# Altium PCB FPGA_DB.PcbDoc (part 5 of 5)
Units mil, origin at the board's own origin, x right, y up, seen from the top; angles counter-clockwise.
Board outline 5980 x 6510 mil, 4 copper layers (Top, Ground Plane, Power Plane, Bottom), stack 61.497 mil thick; 140 components, 246 nets, 1021 pads, 2685 vias.
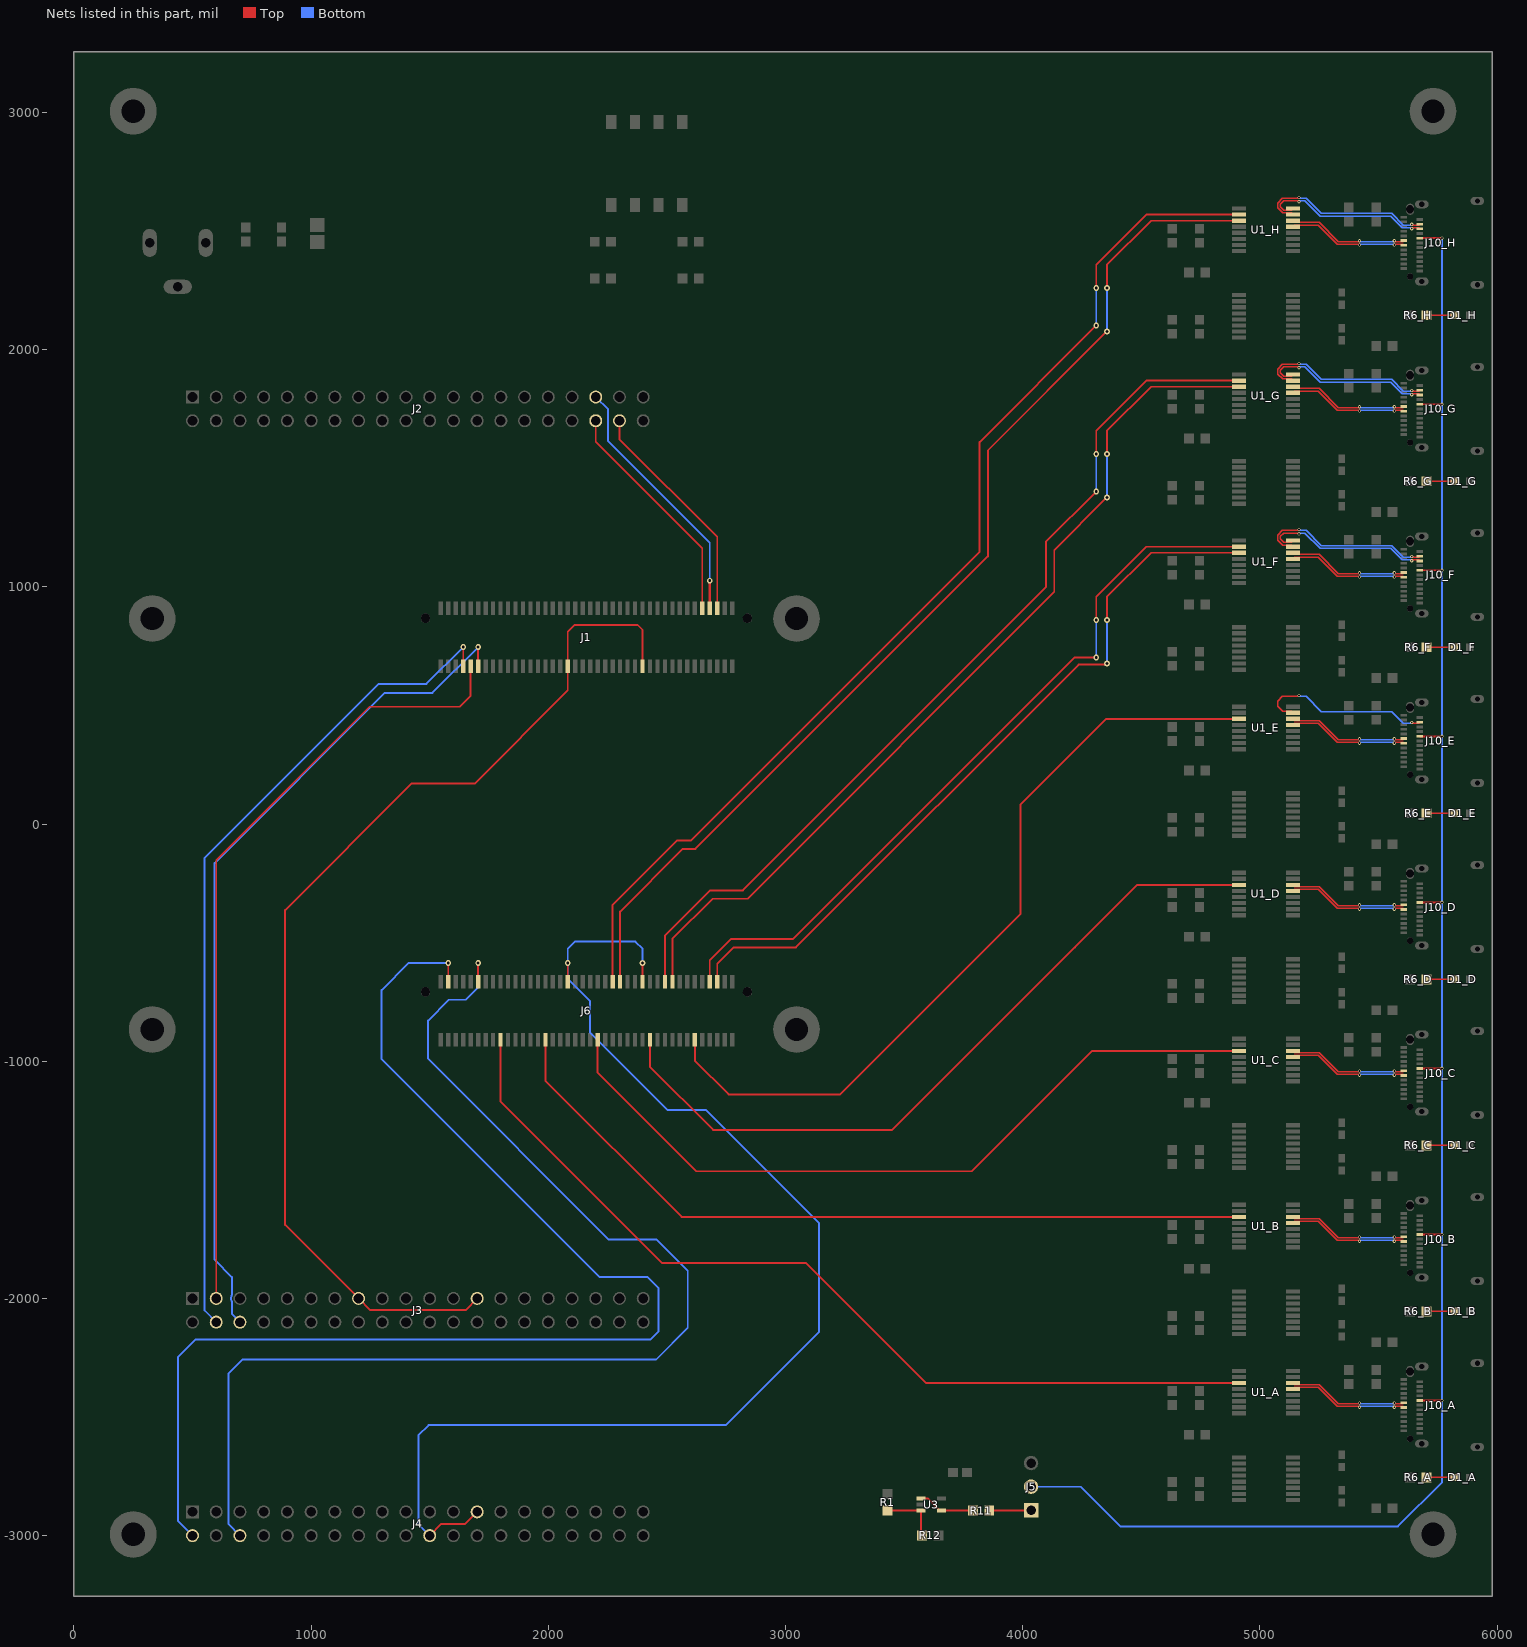
[diagram p7: the nets of this part, all layers, seen from the top]

## Via types
v1: diameter 14, hole 8, Top to Bottom, tented both sides, 2392 vias
v2: diameter 24, hole 12, Top to Bottom, tented both sides, 293 vias

## Nets (pads, with @x,y where several pads share a name; then routed paths per layer and width w, separated by ;. In a path a pad name is that pad's centre, name@x,y a point inside that pad or via, vN(x,y) a via of type N, cw(c..) or ccw(c..) an arc to the next point about the centre after c; other vN are vias at no path point) (continued)
MOSI_E_P: J10_E.B2 U1_E.15 | length 1518.7
  Top w6.3: 5074.33,497.1 5095.32,476.12 ; 5074.33,497.1 5074.33,517.28 ; 5074.33,497.1 5095.32,476.12 ; 5074.33,497.1 5074.33,517.28 ; 5074.33,517.28 5095.13,538.07 ; 5074.33,517.28 5095.13,538.07 ; 5095.13,538.07 v1@5161.65,538.07 ; 5095.13,538.07 v1@5161.65,538.07 ; 5095.32,476.12 U1_E.15@5132.03,476.12 ; 5095.32,476.12 U1_E.15@5132.03,476.12 ; U1_E.15@5132.03,476.12 U1_E.15@5139.17,468.98 U1_E.15@5132.03,476.12 ; v1@5161.65,538.07 v1(5165,541.42) v1@5161.65,538.07 ; v1@5643.35,424.55 J10_E.B2@5669.9,424.55 ; v1@5643.35,424.55 v1(5640,427.9) v1@5643.35,424.55 ; v1@5643.35,424.55 J10_E.B2@5669.9,424.55 ; J10_E.B2@5669.9,424.55 J10_E.B2@5674.09,428.74 J10_E.B2@5669.9,424.55
  Bottom w6.3: v1@5168.35,538.07 v1(5165,541.42) v1@5168.35,538.07 ; v1@5168.35,538.07 5194.68,538.07 ; v1@5168.35,538.07 5194.68,538.07 ; 5194.68,538.07 5258.82,473.93 ; 5194.68,538.07 5258.82,473.93 ; 5258.82,473.93 5540,473.93 ; 5258.82,473.93 5540,473.93 ; 5540,473.93 5555.62,473.93 ; 5540,473.93 5555.62,473.93 ; 5555.62,473.93 5605,424.55 ; 5555.62,473.93 5605,424.55 ; 5605,424.55 v1@5636.65,424.55 ; 5605,424.55 v1@5636.65,424.55 ; v1@5636.65,424.55 v1(5640,427.9) v1@5636.65,424.55
MOSI_F: J6.73 U1_F.2 | length 3194.3
  Top w8: J6.73@2680.59,-665.98 2680.59,-574.41 2770,-485 3031,-485 4217.61,701.61 v2(4310,701.61) ; v2(4310,860) 4310,958.27 4520.71,1168.98 U1_F.2@4910.83,1168.98
  Bottom w8: v2(4310,701.61) v2(4310,860)
MOSI_F_N: J10_F.B3 U1_F.16 | length 721.9
  Top w6.3: U1_F.16@5139.17,1194.57 5132.03,1187.42 5100,1187.42 5085.64,1201.79 5085.64,1212.6 5099.81,1226.77 5161.65,1226.77 v1(5165,1223.42) ; v1(5640,1109.9) 5643.35,1113.25 5669.9,1113.25 J10_F.B3@5674.09,1109.06
  Bottom w6.3: v1(5165,1223.42) 5168.35,1226.77 5190,1226.77 5254.14,1162.63 5294.55,1162.63 5550.93,1162.63 5600.32,1113.25 5636.65,1113.25 v1(5640,1109.9)
MOSI_F_P: J10_F.B2 U1_F.15 | length 759.3
  Top w6.3: U1_F.15@5139.17,1168.98 5132.03,1176.12 5095.32,1176.12 5074.33,1197.1 5074.33,1217.28 5095.13,1238.07 5161.65,1238.07 v1(5165,1241.42) ; v1(5640,1127.9) 5643.35,1124.55 5669.9,1124.55 J10_F.B2@5674.09,1128.74
  Bottom w6.3: v1(5165,1241.42) 5168.35,1238.07 5194.68,1238.07 5258.82,1173.93 5540,1173.93 5555.62,1173.93 5605,1124.55 5636.65,1124.55 v1(5640,1127.9)
MOSI_G: J6.61 U1_G.2 | length 3846.2
  Top w8: J6.61@2491.61,-665.98 2491.61,-470.78 2682.39,-280 2820,-280 4098.02,998.02 4098.02,1189.64 v2(4310,1401.61) ; v2(4310,1560) 4310,1658.27 4520.71,1868.98 U1_G.2@4910.83,1868.98
  Bottom w8: v2(4310,1401.61) v2(4310,1560)
MOSI_G_N: J10_G.B3 U1_G.16 | length 721.9
  Top w6.3: U1_G.16@5139.17,1894.57 5132.03,1887.42 5100,1887.42 5085.64,1901.79 5085.64,1912.6 5099.81,1926.77 5161.65,1926.77 v1(5165,1923.42) ; v1(5640,1809.9) 5643.35,1813.25 5669.9,1813.25 J10_G.B3@5674.09,1809.06
  Bottom w6.3: v1(5165,1923.42) 5168.35,1926.77 5190,1926.77 5254.14,1862.63 5294.55,1862.63 5550.93,1862.63 5600.32,1813.25 5636.65,1813.25 v1(5640,1809.9)
MOSI_G_P: J10_G.B2 U1_G.15 | length 759.3
  Top w6.3: U1_G.15@5139.17,1868.98 5132.03,1876.12 5095.32,1876.12 5074.33,1897.1 5074.33,1917.28 5095.13,1938.07 5161.65,1938.07 v1(5165,1941.42) ; v1(5640,1827.9) 5643.35,1824.55 5669.9,1824.55 J10_G.B2@5674.09,1828.74
  Bottom w6.3: v1(5165,1941.42) 5168.35,1938.07 5194.68,1938.07 5258.82,1873.93 5540,1873.93 5555.62,1873.93 5605,1824.55 5636.65,1824.55 v1(5640,1827.9)
MOSI_H: J6.47 U1_H.2 | length 4590.9
  Top w8: J6.47@2271.14,-665.98 2271.14,-340.86 2542,-70 2600,-70 3818,1148 3818,1609.61 v2(4310,2101.61) ; v2(4310,2260) 4310,2358.27 4520.71,2568.98 U1_H.2@4910.83,2568.98
  Bottom w8: v2(4310,2101.61) v2(4310,2260)
MOSI_H_N: J10_H.B3 U1_H.16 | length 721.9
  Top w6.3: U1_H.16@5139.17,2594.57 5132.03,2587.42 5100,2587.42 5085.64,2601.79 5085.64,2612.6 5099.81,2626.77 5161.65,2626.77 v1(5165,2623.42) ; v1(5640,2509.9) 5643.35,2513.25 5669.9,2513.25 J10_H.B3@5674.09,2509.06
  Bottom w6.3: v1(5165,2623.42) 5168.35,2626.77 5190,2626.77 5254.14,2562.63 5294.55,2562.63 5550.93,2562.63 5600.32,2513.25 5636.65,2513.25 v1(5640,2509.9)
MOSI_H_P: J10_H.B2 U1_H.15 | length 759.3
  Top w6.3: U1_H.15@5139.17,2568.98 5132.03,2576.12 5095.32,2576.12 5074.33,2597.1 5074.33,2617.28 5095.13,2638.07 5161.65,2638.07 v1(5165,2641.42) ; v1(5640,2527.9) 5643.35,2524.55 5669.9,2524.55 J10_H.B2@5674.09,2528.74
  Bottom w6.3: v1(5165,2641.42) 5168.35,2638.07 5194.68,2638.07 5258.82,2573.93 5540,2573.93 5555.62,2573.93 5605,2524.55 5636.65,2524.55 v1(5640,2527.9)
NetD1_A_2: D1_A.2 R6_A.1 | length 118.1
  Top w6.3: R6_A.1@5701.97,-2755 D1_A.2@5820.04,-2755
NetD1_B_2: D1_B.2 R6_B.1 | length 118.1
  Top w6.3: R6_B.1@5701.97,-2055 D1_B.2@5820.04,-2055
NetD1_C_2: D1_C.2 R6_C.1 | length 118.1
  Top w6.3: R6_C.1@5701.97,-1355 D1_C.2@5820.04,-1355
NetD1_D_2: D1_D.2 R6_D.1 | length 118.1
  Top w6.3: R6_D.1@5701.97,-655 D1_D.2@5820.04,-655
NetD1_E_2: D1_E.2 R6_E.1 | length 118.1
  Top w6.3: R6_E.1@5701.97,45 D1_E.2@5820.04,45
NetD1_F_2: D1_F.2 R6_F.1 | length 118.1
  Top w6.3: R6_F.1@5701.97,745 D1_F.2@5820.04,745
NetD1_G_2: D1_G.2 R6_G.1 | length 118.1
  Top w6.3: R6_G.1@5701.97,1445 D1_G.2@5820.04,1445
NetD1_H_2: D1_H.2 R6_H.1 | length 118.1
  Top w6.3: R6_H.1@5701.97,2145 D1_H.2@5820.04,2145
NetJ5_1: J5.1 R11.2 | length 176.3
  Top w8: R11.2@3858.9,-2894.57 4034.41,-2894.57 J5.1@4035,-2893.98
NetR1_2: R1.2 R12.1 U3.3 | length 247.9
  Top w8: R1.2@3430,-2893.98 3430.59,-2894.57 U3.3@3571.69,-2894.57 3571.69,-2995.12 R12.1@3575.55,-2998.98
NetR11_1: R11.1 U3.1 U3.4 | length 239.5
  Top w8: U3.1@3571.69,-2843.39 3599.41,-2843.39 3650.59,-2894.57 U3.4@3658.31,-2894.57 R11.1@3790,-2894.57
REF: J5.2 J10_A.B5 J10_B.B5 J10_C.B5 J10_D.B5 J10_E.B5 J10_F.B5 J10_G.B5 J10_H.B5 | length 7872.4
  Top w8: J10_A.B5@5674.09,-2430.31 v1(5767.65,-2430.31) ; J10_B.B5@5674.09,-1730.31 v1(5767.65,-1730.31) ; J10_C.B5@5674.09,-1030.31 v1(5767.65,-1030.31) ; J10_D.B5@5674.09,-330.31 v1(5767.65,-330.31) ; J10_E.B5@5674.09,369.69 v1(5767.65,369.69) ; J10_F.B5@5674.09,1069.69 v1(5767.65,1069.69) ; J10_G.B5@5674.09,1769.69 v1(5767.65,1769.69) ; J10_H.B5@5674.09,2469.69 v1(5767.65,2469.69)
  Bottom w8: J5.2@4035,-2793.98 4245.01,-2793.98 4412.19,-2961.15 5581.97,-2961.15 5767.65,-2775.47 v1(5767.65,2469.69)
SCLK_A: J6.18 U1_A.3 | length 3865
  Top w8: J6.18@1798.7,-908.98 1798.7,-1170.52 2478.18,-1850 3085,-1850 3591.61,-2356.61 4265,-2356.61 U1_A.3@4910.83,-2356.61
SCLK_A_N: J10_A.A6 U1_A.13 | length 511.6
  Top w6.3: U1_A.13@5139.17,-2382.2 5146.32,-2375.06 5245.52,-2375.06 5326.11,-2455.65 5416.65,-2455.65 v1(5420,-2459) ; v1(5566.74,-2459) 5570.08,-2455.65 5602.97,-2455.65 J10_A.A6@5607.17,-2459.84
  Bottom w6.3: v1(5420,-2459) 5423.35,-2455.65 5563.39,-2455.65 v1(5566.74,-2459)
SCLK_A_P: J10_A.A7 U1_A.14 | length 511.6
  Top w6.3: U1_A.14@5139.17,-2356.61 5146.32,-2363.76 5250.2,-2363.76 5330.79,-2444.35 5416.65,-2444.35 v1(5420,-2441) ; v1(5566.74,-2441) 5570.08,-2444.35 5602.97,-2444.35 J10_A.A7@5607.17,-2440.16
  Bottom w6.3: v1(5420,-2441) 5423.35,-2444.35 5563.39,-2444.35 v1(5566.74,-2441)
SCLK_B: J6.30 U1_B.3 | length 3334.6
  Top w8: J6.30@1987.68,-908.98 1987.68,-1082.68 2561.61,-1656.61 4609.36,-1656.61 4724.36,-1656.61 U1_B.3@4910.83,-1656.61
SCLK_B_N: J10_B.A6 U1_B.13 | length 1023.2
  Top w6.3: U1_B.13@5146.32,-1675.06 U1_B.13@5139.17,-1682.2 U1_B.13@5146.32,-1675.06 ; U1_B.13@5146.32,-1675.06 5245.52,-1675.06 ; U1_B.13@5146.32,-1675.06 5245.52,-1675.06 ; 5245.52,-1675.06 5326.11,-1755.65 ; 5245.52,-1675.06 5326.11,-1755.65 ; 5326.11,-1755.65 v1@5416.65,-1755.65 ; 5326.11,-1755.65 v1@5416.65,-1755.65 ; v1@5416.65,-1755.65 v1(5420,-1759) v1@5416.65,-1755.65 ; v1@5570.08,-1755.65 J10_B.A6@5602.97,-1755.65 ; v1@5570.08,-1755.65 v1(5566.74,-1759) v1@5570.08,-1755.65 ; v1@5570.08,-1755.65 J10_B.A6@5602.97,-1755.65 ; J10_B.A6@5602.97,-1755.65 J10_B.A6@5607.17,-1759.84 J10_B.A6@5602.97,-1755.65
  Bottom w6.3: v1@5423.35,-1755.65 v1@5563.39,-1755.65 ; v1@5423.35,-1755.65 v1(5420,-1759) v1@5423.35,-1755.65 ; v1@5423.35,-1755.65 v1@5563.39,-1755.65 ; v1@5563.39,-1755.65 v1(5566.74,-1759) v1@5563.39,-1755.65
SCLK_B_P: J10_B.A7 U1_B.14 | length 1023.2
  Top w6.3: U1_B.14@5146.32,-1663.76 U1_B.14@5139.17,-1656.61 U1_B.14@5146.32,-1663.76 ; U1_B.14@5146.32,-1663.76 5250.2,-1663.76 ; U1_B.14@5146.32,-1663.76 5250.2,-1663.76 ; 5250.2,-1663.76 5330.79,-1744.35 ; 5250.2,-1663.76 5330.79,-1744.35 ; 5330.79,-1744.35 v1@5416.65,-1744.35 ; 5330.79,-1744.35 v1@5416.65,-1744.35 ; v1@5416.65,-1744.35 v1(5420,-1741) v1@5416.65,-1744.35 ; v1@5570.08,-1744.35 J10_B.A7@5602.97,-1744.35 ; v1@5570.08,-1744.35 v1(5566.74,-1741) v1@5570.08,-1744.35 ; v1@5570.08,-1744.35 J10_B.A7@5602.97,-1744.35 ; J10_B.A7@5602.97,-1744.35 J10_B.A7@5607.17,-1740.16 J10_B.A7@5602.97,-1744.35
  Bottom w6.3: v1@5423.35,-1744.35 v1@5563.39,-1744.35 ; v1@5423.35,-1744.35 v1(5420,-1741) v1@5423.35,-1744.35 ; v1@5423.35,-1744.35 v1@5563.39,-1744.35 ; v1@5563.39,-1744.35 v1(5566.74,-1741) v1@5563.39,-1744.35
SCLK_C: J6.44 U1_C.3 | length 3224.4
  Top w8: J6.44@2208.15,-908.98 2208.15,-1048.66 2623.35,-1463.86 3786.14,-1463.86 4293.39,-956.61 U1_C.3@4910.83,-956.61
SCLK_C_N: J10_C.A6 U1_C.13 | length 1023.2
  Top w6.3: U1_C.13@5146.32,-975.06 U1_C.13@5139.17,-982.2 U1_C.13@5146.32,-975.06 ; U1_C.13@5146.32,-975.06 5245.52,-975.06 ; U1_C.13@5146.32,-975.06 5245.52,-975.06 ; 5245.52,-975.06 5326.11,-1055.65 ; 5245.52,-975.06 5326.11,-1055.65 ; 5326.11,-1055.65 v1@5416.65,-1055.65 ; 5326.11,-1055.65 v1@5416.65,-1055.65 ; v1@5416.65,-1055.65 v1(5420,-1059) v1@5416.65,-1055.65 ; v1@5570.08,-1055.65 J10_C.A6@5602.97,-1055.65 ; v1@5570.08,-1055.65 v1(5566.74,-1059) v1@5570.08,-1055.65 ; v1@5570.08,-1055.65 J10_C.A6@5602.97,-1055.65 ; J10_C.A6@5602.97,-1055.65 J10_C.A6@5607.17,-1059.84 J10_C.A6@5602.97,-1055.65
  Bottom w6.3: v1@5423.35,-1055.65 v1@5563.39,-1055.65 ; v1@5423.35,-1055.65 v1(5420,-1059) v1@5423.35,-1055.65 ; v1@5423.35,-1055.65 v1@5563.39,-1055.65 ; v1@5563.39,-1055.65 v1(5566.74,-1059) v1@5563.39,-1055.65
SCLK_C_P: J10_C.A7 U1_C.14 | length 1023.2
  Top w6.3: U1_C.14@5146.32,-963.76 U1_C.14@5139.17,-956.61 U1_C.14@5146.32,-963.76 ; U1_C.14@5146.32,-963.76 5250.2,-963.76 ; U1_C.14@5146.32,-963.76 5250.2,-963.76 ; 5250.2,-963.76 5330.79,-1044.35 ; 5250.2,-963.76 5330.79,-1044.35 ; 5330.79,-1044.35 v1@5416.65,-1044.35 ; 5330.79,-1044.35 v1@5416.65,-1044.35 ; v1@5416.65,-1044.35 v1(5420,-1041) v1@5416.65,-1044.35 ; v1@5570.08,-1044.35 J10_C.A7@5602.97,-1044.35 ; v1@5570.08,-1044.35 v1(5566.74,-1041) v1@5570.08,-1044.35 ; v1@5570.08,-1044.35 J10_C.A7@5602.97,-1044.35 ; J10_C.A7@5602.97,-1044.35 J10_C.A7@5607.17,-1040.16 J10_C.A7@5602.97,-1044.35
  Bottom w6.3: v1@5423.35,-1044.35 v1@5563.39,-1044.35 ; v1@5423.35,-1044.35 v1(5420,-1041) v1@5423.35,-1044.35 ; v1@5423.35,-1044.35 v1@5563.39,-1044.35 ; v1@5563.39,-1044.35 v1(5566.74,-1041) v1@5563.39,-1044.35
SCLK_D: J6.58 U1_D.3 | length 3135.2
  Top w8: J6.58@2428.62,-908.98 2428.62,-1023.62 2695,-1290 3450,-1290 4220,-520 4483.39,-256.61 U1_D.3@4910.83,-256.61
SCLK_D_N: J10_D.A6 U1_D.13 | length 1023.2
  Top w6.3: U1_D.13@5146.32,-275.06 U1_D.13@5139.17,-282.2 U1_D.13@5146.32,-275.06 ; U1_D.13@5146.32,-275.06 5245.52,-275.06 ; U1_D.13@5146.32,-275.06 5245.52,-275.06 ; 5245.52,-275.06 5326.11,-355.65 ; 5245.52,-275.06 5326.11,-355.65 ; 5326.11,-355.65 v1@5416.65,-355.65 ; 5326.11,-355.65 v1@5416.65,-355.65 ; v1@5416.65,-355.65 v1(5420,-359) v1@5416.65,-355.65 ; v1@5570.08,-355.65 J10_D.A6@5602.97,-355.65 ; v1@5570.08,-355.65 v1(5566.74,-359) v1@5570.08,-355.65 ; v1@5570.08,-355.65 J10_D.A6@5602.97,-355.65 ; J10_D.A6@5602.97,-355.65 J10_D.A6@5607.17,-359.84 J10_D.A6@5602.97,-355.65
  Bottom w6.3: v1@5423.35,-355.65 v1@5563.39,-355.65 ; v1@5423.35,-355.65 v1(5420,-359) v1@5423.35,-355.65 ; v1@5423.35,-355.65 v1@5563.39,-355.65 ; v1@5563.39,-355.65 v1(5566.74,-359) v1@5563.39,-355.65
SCLK_D_P: J10_D.A7 U1_D.14 | length 1023.2
  Top w6.3: U1_D.14@5146.32,-263.76 U1_D.14@5139.17,-256.61 U1_D.14@5146.32,-263.76 ; U1_D.14@5146.32,-263.76 5250.2,-263.76 ; U1_D.14@5146.32,-263.76 5250.2,-263.76 ; 5250.2,-263.76 5330.79,-344.35 ; 5250.2,-263.76 5330.79,-344.35 ; 5330.79,-344.35 v1@5416.65,-344.35 ; 5330.79,-344.35 v1@5416.65,-344.35 ; v1@5416.65,-344.35 v1(5420,-341) v1@5416.65,-344.35 ; v1@5570.08,-344.35 J10_D.A7@5602.97,-344.35 ; v1@5570.08,-344.35 v1(5566.74,-341) v1@5570.08,-344.35 ; v1@5570.08,-344.35 J10_D.A7@5602.97,-344.35 ; J10_D.A7@5602.97,-344.35 J10_D.A7@5607.17,-340.16 J10_D.A7@5602.97,-344.35
  Bottom w6.3: v1@5423.35,-344.35 v1@5563.39,-344.35 ; v1@5423.35,-344.35 v1(5420,-341) v1@5423.35,-344.35 ; v1@5423.35,-344.35 v1@5563.39,-344.35 ; v1@5563.39,-344.35 v1(5566.74,-341) v1@5563.39,-344.35
SCLK_E: J6.70 U1_E.3 | length 3367
  Top w8: J6.70@2617.6,-908.98 2617.6,-997.6 2760,-1140 3230,-1140 3990,-380 3990,81.46 4351.93,443.39 U1_E.3@4910.83,443.39
SCLK_E_N: J10_E.A6 U1_E.13 | length 1023.2
  Top w6.3: U1_E.13@5146.32,424.94 U1_E.13@5139.17,417.8 U1_E.13@5146.32,424.94 ; U1_E.13@5146.32,424.94 5245.52,424.94 ; U1_E.13@5146.32,424.94 5245.52,424.94 ; 5245.52,424.94 5326.11,344.35 ; 5245.52,424.94 5326.11,344.35 ; 5326.11,344.35 v1@5416.65,344.35 ; 5326.11,344.35 v1@5416.65,344.35 ; v1@5416.65,344.35 v1(5420,341) v1@5416.65,344.35 ; v1@5570.08,344.35 J10_E.A6@5602.97,344.35 ; v1@5570.08,344.35 v1(5566.74,341) v1@5570.08,344.35 ; v1@5570.08,344.35 J10_E.A6@5602.97,344.35 ; J10_E.A6@5602.97,344.35 J10_E.A6@5607.17,340.16 J10_E.A6@5602.97,344.35
  Bottom w6.3: v1@5423.35,344.35 v1@5563.39,344.35 ; v1@5423.35,344.35 v1(5420,341) v1@5423.35,344.35 ; v1@5423.35,344.35 v1@5563.39,344.35 ; v1@5563.39,344.35 v1(5566.74,341) v1@5563.39,344.35
SCLK_E_P: J10_E.A7 U1_E.14 | length 1023.2
  Top w6.3: U1_E.14@5146.32,436.24 U1_E.14@5139.17,443.39 U1_E.14@5146.32,436.24 ; U1_E.14@5146.32,436.24 5250.2,436.24 ; U1_E.14@5146.32,436.24 5250.2,436.24 ; 5250.2,436.24 5330.79,355.65 ; 5250.2,436.24 5330.79,355.65 ; 5330.79,355.65 v1@5416.65,355.65 ; 5330.79,355.65 v1@5416.65,355.65 ; v1@5416.65,355.65 v1(5420,359) v1@5416.65,355.65 ; v1@5570.08,355.65 J10_E.A7@5602.97,355.65 ; v1@5570.08,355.65 v1(5566.74,359) v1@5570.08,355.65 ; v1@5570.08,355.65 J10_E.A7@5602.97,355.65 ; J10_E.A7@5602.97,355.65 J10_E.A7@5607.17,359.84 J10_E.A7@5602.97,355.65
  Bottom w6.3: v1@5423.35,355.65 v1@5563.39,355.65 ; v1@5423.35,355.65 v1(5420,359) v1@5423.35,355.65 ; v1@5423.35,355.65 v1@5563.39,355.65 ; v1@5563.39,355.65 v1(5566.74,359) v1@5563.39,355.65
SCLK_F: J6.75 U1_F.3 | length 3157.6
  Top w8: J6.75@2712.09,-665.98 2712.09,-589.07 2781.16,-520 3044,-520 4235.61,671.61 4350,671.61 v2(4355,676.61) ; v2(4355,860) 4355,957.2 4541.18,1143.39 U1_F.3@4910.83,1143.39
  Bottom w8: v2(4355,676.61) v2(4355,860)
SCLK_F_N: J10_F.A6 U1_F.13 | length 511.6
  Top w6.3: U1_F.13@5139.17,1117.8 5146.32,1124.94 5245.52,1124.94 5326.11,1044.35 5416.65,1044.35 v1(5420,1041) ; v1(5566.74,1041) 5570.08,1044.35 5602.97,1044.35 J10_F.A6@5607.17,1040.16
  Bottom w6.3: v1(5420,1041) 5423.35,1044.35 5563.39,1044.35 v1(5566.74,1041)
SCLK_F_P: J10_F.A7 U1_F.14 | length 511.6
  Top w6.3: U1_F.14@5139.17,1143.39 5146.32,1136.24 5250.2,1136.24 5330.79,1055.65 5416.65,1055.65 v1(5420,1059) ; v1(5566.74,1059) 5570.08,1055.65 5602.97,1055.65 J10_F.A7@5607.17,1059.84
  Bottom w6.3: v1(5420,1059) 5423.35,1055.65 5563.39,1055.65 v1(5566.74,1059)
SCLK_G: J6.63 U1_G.3 | length 3801.4
  Top w8: J6.63@2523.11,-665.98 2523.11,-484.28 2692.39,-315 2840,-315 4133.12,978.12 4133.12,1154.73 v2(4355,1376.61) ; v2(4355,1560) 4355,1657.2 4541.18,1843.39 U1_G.3@4910.83,1843.39
  Bottom w8: v2(4355,1376.61) v2(4355,1560)
SCLK_G_N: J10_G.A6 U1_G.13 | length 511.6
  Top w6.3: U1_G.13@5139.17,1817.8 5146.32,1824.94 5245.52,1824.94 5326.11,1744.35 5416.65,1744.35 v1(5420,1741) ; v1(5566.74,1741) 5570.08,1744.35 5602.97,1744.35 J10_G.A6@5607.17,1740.16
  Bottom w6.3: v1(5420,1741) 5423.35,1744.35 5563.39,1744.35 v1(5566.74,1741)
SCLK_G_P: J10_G.A7 U1_G.14 | length 511.6
  Top w6.3: U1_G.14@5139.17,1843.39 5146.32,1836.24 5250.2,1836.24 5330.79,1755.65 5416.65,1755.65 v1(5420,1759) ; v1(5566.74,1759) 5570.08,1755.65 5602.97,1755.65 J10_G.A7@5607.17,1759.84
  Bottom w6.3: v1(5420,1759) 5423.35,1755.65 5563.39,1755.65 v1(5566.74,1759)
SCLK_H: J6.49 U1_H.3 | length 4537.3
  Top w8: J6.49@2302.64,-665.98 2302.64,-369.36 2567,-105 2620,-105 3853,1128 3853,1574.61 v2(4355,2076.61) ; v2(4355,2260) 4355,2357.2 4541.18,2543.39 U1_H.3@4910.83,2543.39
  Bottom w8: v2(4355,2076.61) v2(4355,2260)
SCLK_H_N: J10_H.A6 U1_H.13 | length 511.6
  Top w6.3: U1_H.13@5139.17,2517.8 5146.32,2524.94 5245.52,2524.94 5326.11,2444.35 5416.65,2444.35 v1(5420,2441) ; v1(5566.74,2441) 5570.08,2444.35 5602.97,2444.35 J10_H.A6@5607.17,2440.16
  Bottom w6.3: v1(5420,2441) 5423.35,2444.35 5563.39,2444.35 v1(5566.74,2441)
SCLK_H_P: J10_H.A7 U1_H.14 | length 511.6
  Top w6.3: U1_H.14@5139.17,2543.39 5146.32,2536.24 5250.2,2536.24 5330.79,2455.65 5416.65,2455.65 v1(5420,2459) ; v1(5566.74,2459) 5570.08,2455.65 5602.97,2455.65 J10_H.A7@5607.17,2459.84
  Bottom w6.3: v1(5420,2459) 5423.35,2455.65 5563.39,2455.65 v1(5566.74,2459)
status_led_1: J1.75 J2.38 | length 961.9
  Top w8: J2.38@2300,1700 2300,1623 2712.09,1210.91 J1.75@2712.09,908.82
status_led_2: J1.73 J2.35 | length 1090.2
  Top w10: J1.73@2680.59,908.82 v2(2680.59,1026)
  Bottom w8: J2.35@2200,1800 2252,1748 2252,1614.49 2680.59,1185.9 v2(2680.59,1026)
status_led_3: J1.71 J2.36 | length 977.2
  Top w8: J2.36@2200,1700 2200,1610.64 2649.09,1161.54 J1.71@2649.09,908.82
SYS_CLK_MC1: J1.08 J3.04 | length 3515.9
  Top w8: J1.08@1641.22,665.83 v2(1641.22,746)
  Bottom w8: J3.04@600,-2100 551,-2051 551,-143 1285,591 1486.22,591 v2(1641.22,746)
SYS_CLK_MC2: J4.06 J6.11 | length 5038.5
  Top w8: J6.11@1704.21,-665.98 v2(1704.21,-585.81)
  Bottom w8: J4.06@700,-3000 652,-2952 652,-2316 710,-2258 2454,-2258 2588,-2124 2588,-1882.55 2457.15,-1751.7 2255.49,-1751.7 1493,-989.2 1493,-829 1581,-741 1652,-741 1704.21,-688.79 v2(1704.21,-585.81)
VBAT: J4.02 J6.03 | length 5298.2
  Top w8: J6.03@1578.23,-665.98 v2(1578.23,-585.81)
  Bottom w8: J4.02@500,-3000 439,-2939 439,-2247 512.27,-2173.73 2430.27,-2173.73 2465,-2139 2465,-1958.16 2416.48,-1909.64 2215.64,-1909.64 1297,-991 1297,-700 1411.19,-585.81 v2(1578.23,-585.81)
VCCO_MC1: J1.36 J1.56 J3.15 J3.25 | length 4616.5
  Top w8: J3.25@1700,-2000 1651,-2049 1249,-2049 J3.15@1200,-2000 890,-1690 890,-363 1423,170 1689,170 2082.17,563.17 J1.36@2082.17,665.83 2082.17,810.17 2111,839 2376,839 2397.13,817.87 J1.56@2397.13,665.83
VCCO_MC2: J4.22 J4.25 J6.35 J6.55 | length 5263.6
  Top w8: J4.22@1500,-3000 1549,-2951 1649,-2951 J4.25@1700,-2900 ; J6.35@2082.17,-665.98 v2(2082.17,-585.81) ; J6.55@2397.13,-665.98 v2(2397.13,-585.81)
  Bottom w8: J4.22@1500,-3000 1452,-2952 1452,-2577 1495,-2534 2749,-2534 3142,-2141 3142,-1683 2665,-1206 2503.26,-1206 2175,-877.74 2175,-746 2082.17,-653.17 v2(2082.17,-585.81) 2082.17,-525.83 2112,-496 2367,-496 2397.13,-526.13 v2(2397.13,-585.81)
XADC_VN: J1.10 J3.03 | length 3332.7
  Top w8: J3.03@600,-2000 600,-152.03 1246.15,494.12 1626.13,494.12 1672.72,540.71 J1.10@1672.72,665.83
XADC_VP: J1.12 J3.06 | length 3549
  Top w8: J1.12@1704.21,665.83 v2(1704.21,746)
  Bottom w8: J3.06@700,-2100 700,-2098 666,-2064 666,-2015.49 cw(c700,-2000) 666,-1984.51 666,-1910 593,-1837 593,-165 1311,553 1511.21,553 v2(1704.21,746)
pads on no net: J1. J6. J9.3 J10_A. J10_A.A5 J10_A.B6 J10_A.B7 J10_B. J10_B.A5 J10_B.B6 J10_B.B7 J10_C. J10_C.A5 J10_C.B6 J10_C.B7 J10_D. J10_D.A5 J10_D.B6 J10_D.B7 J10_E. J10_E.A5 J10_E.B6 J10_E.B7 J10_F. J10_F.A5 J10_F.B6 J10_F.B7 J10_G. J10_G.A5 J10_G.B6 J10_G.B7 J10_H. J10_H.A5 J10_H.B6 J10_H.B7 U1_A.7 U1_A.9 U1_A.10 U1_B.7 U1_B.9 U1_B.10 U1_C.7 U1_C.9 U1_C.10 U1_D.7 U1_D.9 U1_D.10 U1_E.7 U1_E.9 U1_E.10 U1_F.7 U1_F.9 U1_F.10 U1_G.7 U1_G.9 U1_G.10 U1_H.7 U1_H.9 U1_H.10 U2_A.3 U2_A.4 U2_A.5 U2_A.6 U2_A.14 U2_A.15 U2_B.3 U2_B.4 U2_B.5 U2_B.6 U2_B.14 U2_B.15 U2_C.3 U2_C.4 U2_C.5 U2_C.6 U2_C.14 U2_C.15 U2_D.3 U2_D.4 U2_D.5 U2_D.6 U2_D.14 U2_D.15 U2_E.3 U2_E.4 U2_E.5 U2_E.6 U2_E.14 U2_E.15 U2_F.3 U2_F.4 U2_F.5 U2_F.6 U2_F.14 U2_F.15 U2_G.3 U2_G.4 U2_G.5 U2_G.6 U2_G.14 U2_G.15 U2_H.3 U2_H.4 U2_H.5 U2_H.6 U2_H.14 U2_H.15

## Polygon pours and split planes (outlines as drawn)
GND on Bottom "GND_BOT" (solid, remove dead copper, pour order 3): 5980,-3255 5980,3255 0,3255 0,-3255
GND on Top "GND_TOP" (solid, remove dead copper, pour order 1): 0,-3255 0,3255 5980,3255 5980,-3255
5V0 on Top "5V0_TOP" (solid, remove dead copper, pour order 0): 1580.04,809.31 0,809.31 0,3255 1150,3255 1150,2269 1028,2147 728,2147 652,2071 652,1771 632,1751 571,1751 553,1733 553,1656.58 1013.58,1196 1377.18,1196 1609.18,964 1630,943.18 1630,859.28
3V3 on Power Plane (split plane): 5959.9,-3234.9 20.1,-3234.9 20.1,3234.9 5959.9,3234.9
GND on Ground Plane (split plane): 5959.9,-3234.9 20.1,-3234.9 20.1,3234.9 5959.9,3234.9

## Silkscreen, mask and mechanical layers (free items; w line width, h text height)
Top Overlay:
  region: 3483,2508 3483,2688 3393,2688 3393,2508
  region: 3683,2698 3683,2878 3593,2878 3593,2698
  region: 3583,2508 3583,2688 3493,2688 3493,2508
  region: 3783,2508 3783,2688 3693,2688 3693,2508
  lines w10: 211.89,-984.25 3164.65,-984.25 3164.65,984.25 211.89,984.25 211.89,-984.25 ; 3378,2498 3378,2888 3798,2888 3798,2498 3378,2498
  text "OFF" at 3327.61,2745.87 h39.37 r90
  text "ON" at 3327.61,2555.87 h39.37 r90
  text "1" at 3660.13,2363.87 h39.37 r90
  text "3" at 3460.13,2355.87 h39.37 r90
  text "2" at 3560.13,2355.87 h39.37 r90
  text "0" at 3760.13,2355.87 h39.37 r90
  text "Mode" at 3362.84,2295.87 h39.37 r90
  text "Board" at 3290.13,2275.87 h39.37 r90
  text "01" at 518.7,1890.56 h31.5 r90
  text "39" at 2413.7,1886.3 h31.5 r90
  text "40" at 2413.7,1561.3 h31.5 r90
  text "02" at 518.7,1551.3 h31.5 r90
  text "MC1" at 1306.3,1027.94 h31.5
  text "MC2" at 1616.02,-1076.38 h31.5
  text "01" at 513.7,-1924.44 h31.5 r90
  text "39" at 2413.7,-1928.7 h31.5 r90
  text "02" at 513.7,-2233.7 h31.5 r90
  text "40" at 2413.7,-2233.7 h31.5 r90
  text "GND" at 4113,-2707 h40
  text "39" at 2413.7,-2823.7 h31.5 r90
  text "01" at 513.7,-2829.44 h31.5 r90
  text "REF" at 4118,-2917 h40
  text "02" at 513.7,-3133.7 h31.5 r90
  text "40" at 2418.7,-3133.7 h31.5 r90
Bottom Overlay:
  drawing of 10 lines, arcs and shapes, not listed
  text "Serial #" at 3560,2805 h78.74
  text ".Project_Global" at 5384.25,2745.75 h78.74
  text ".Project_Name" at 5605,2735 h78.74
  text ".Project_Designer1" at 5384.25,2606.99 h78.74
Board Outline:
  the board outline again, w10

## Text inside footprints (layer, text, board x,y; h text height)
J10_A: Top Assembly "PCB EDGE" at 5962.48,-2243.31 h40 r90
J10_B: Top Assembly "PCB EDGE" at 5962.48,-1543.31 h40 r90
J10_C: Top Assembly "PCB EDGE" at 5962.48,-843.31 h40 r90
J10_D: Top Assembly "PCB EDGE" at 5962.48,-143.31 h40 r90
J10_E: Top Assembly "PCB EDGE" at 5962.48,556.69 h40 r90
J10_F: Top Assembly "PCB EDGE" at 5962.48,1256.69 h40 r90
J10_G: Top Assembly "PCB EDGE" at 5962.48,1956.69 h40 r90
J10_H: Top Assembly "PCB EDGE" at 5962.48,2656.69 h40 r90